# EAGLE board GPS_radiologger_v6 (EAGLE 9.5.2)
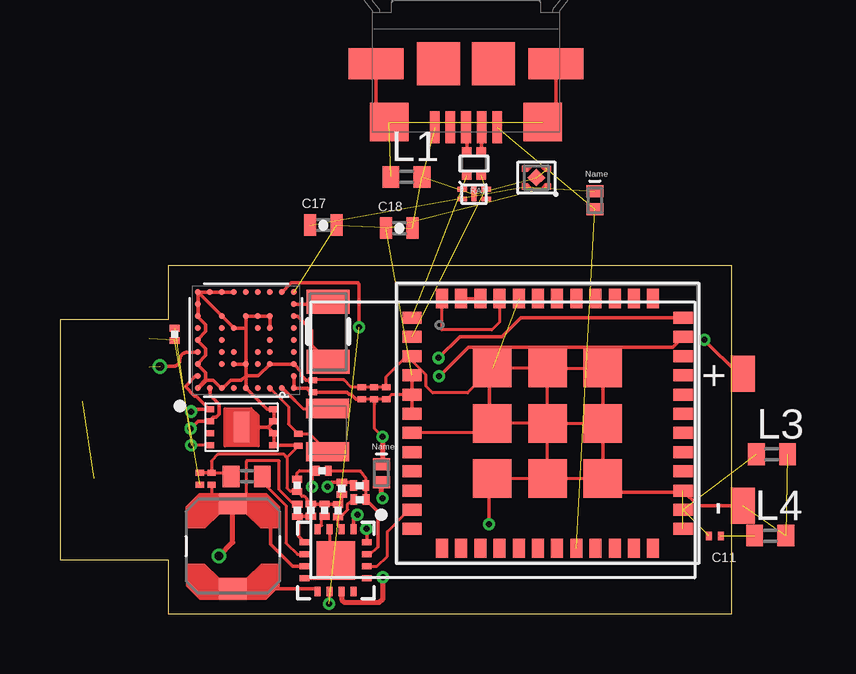
[diagram p0: board, top side]
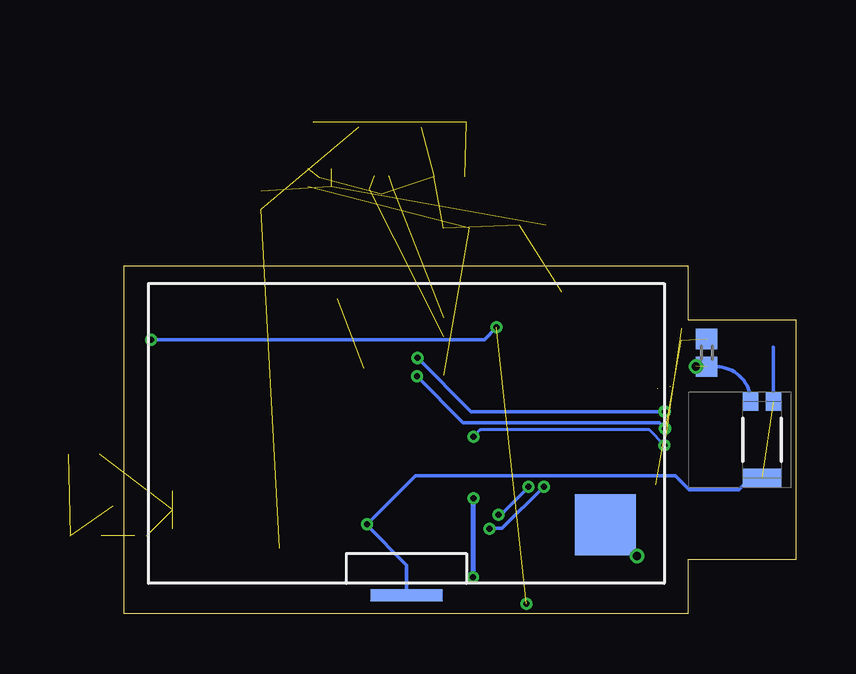
[diagram p1: board, bottom side, seen from below]

Size 28 x 14.5 mm. Coordinates in mm from the lower left corner, seen from the top.
Outline: 4.5,0 28,0 28,14.5 4.5,14.5 4.5,12.25 0,12.25 0,2.25 4.5,2.25 4.5,0
Copper layers (1*16): Top 0.035mm / dielectric 1.5mm / Bottom 0.035mm
Design rules "default *": minimum track width 5mil, minimum drill 0.25mm, track to track 5mil, track to pad 5mil, pad to pad 5mil, via to via 5mil, smd to smd 5mil, copper to edge 20mil, drill to drill 3mil, minimum pad ring 10mil, minimum via ring 5mil, stop-mask expansion 4mil, vias tented up to drill 0mil, thermal gap 10mil
Net classes: 1 vcc: width 0 mm

## Footprints (pad centres in the part's own frame; a part is rotated, then mirrored left to right if it is on the bottom)
C0201 = smd 0.25 x 0.35: 1 -0.25,0; 2 0.25,0
C0402 = smd 0.7 x 0.9: 1 -0.65,0; 2 0.65,0
0402-CAP = smd 0.5 x 0.9: 1 -0.55,0; 2 0.55,0
CDSQR4148-HF = smd 0.7 x 0.5: P$1 0,0.375; P$2 0,-0.375
USBULC6-2N4 = smd 0.2 x 0.4: P$1 0.2,0.5; P$2 -0.2,0.5; P$3 -0.2,-0.5; P$4 0.2,-0.5 | smd 0.6 x 0.2: P$5 0,0
0402 = smd 0.85 x 0.9: 1 -0.58,0; 2 0.58,0
1981584-1 = smd 0.4 x 1.35: 1 -1.3,4.1; 2 -0.65,4.1; 3 0,4.1; 4 0.65,4.1; 5 1.3,4.1 | smd 1.8 x 1.8: M1 -1.15,1.45; M2 1.15,1.45 | smd 2.3 x 1.3: S1 -3.75,1.45; S2 3.75,1.45 | smd 1.6 x 1.6: S3 -3.2,3.885; S4 3.2,3.885
0402' = smd 0.7 x 0.9: 1 -0.65,0; 2 0.65,0
0806 = smd 0.8 x 1.8: 1 -0.9,0; 2 0.9,0
IND_LPS4012-103MRB = smd 0.87 x 1.15: 1 -1.765,0; 2 1.765,0
R0201 = smd 0.28 x 0.43: 1 -0.255,0; 2 0.255,0
EXB24V = smd 0.4 x 0.36: P$1 -0.3,0.5; P$2 0.3,0.5; P$3 -0.3,-0.5; P$4 0.3,-0.5
TYPEABZ = smd 0.8 x 0.5: P$1 -5.65,4.4; P$2 -5.65,3.6; P$3 -5.65,2.8; P$4 -5.65,2; P$5 -5.65,1.2; P$6 -5.65,0.4; P$7 -5.65,-0.4; P$8 -5.65,-1.2; P$9 -5.65,-2; P$10 -5.65,-2.8; P$11 -5.65,-3.6; P$12 -5.65,-4.4; P$25 5.65,-4.4; P$26 5.65,-3.6; P$27 5.65,-2.8; P$28 5.65,-2; P$29 5.65,-1.2; P$30 5.65,-0.4; P$31 5.65,0.4; P$32 5.65,1.2; P$33 5.65,2; P$34 5.65,2.8; P$35 5.65,3.6; P$36 5.65,4.4 | smd 0.5 x 0.8: P$13 -4.4,-5.2; P$14 -3.6,-5.2; P$15 -2.8,-5.2; P$16 -2,-5.2; P$17 -1.2,-5.2; P$18 -0.4,-5.2; P$19 0.4,-5.2; P$20 1.2,-5.2; P$21 2,-5.2; P$22 2.8,-5.2; P$23 3.6,-5.2; P$24 4.4,-5.2; P$37 4.4,5.2; P$38 3.6,5.2; P$39 2.8,5.2; P$40 2,5.2; P$41 1.2,5.2; P$42 0.4,5.2; P$43 -0.4,5.2; P$44 -1.2,5.2; P$45 -2,5.2; P$46 -2.8,5.2; P$47 -3.6,5.2; P$48 -4.4,5.2 | smd 1.6 x 1.6: P$49 -2.3,2.3; P$50 0,2.3; P$51 2.3,2.3; P$52 -2.3,0; P$53 0,0; P$54 2.3,0; P$55 -2.3,-2.3; P$56 0,-2.3; P$57 2.3,-2.3
UBLOX_ZOE_M8-0-10 = smd 0.25 x 0.25: 1 -1.996,2.004; 2 -1.496,2.004; 3 -0.996,2.004; 4 -0.496,2.004; 5 0.004,2.004; 6 0.504,2.004; 7 1.004,2.004; 8 1.504,2.004; 9 2.004,2.004; 10 2.004,1.504; 11 2.004,1.004; 12 2.004,0.504; 13 2.004,0.004; 14 2.004,-0.496; 15 2.004,-0.996; 16 2.004,-1.496; 17 2.004,-1.996; 18 1.504,-1.996; 19 1.004,-1.996; 20 0.504,-1.996; 21 0.004,-1.996; 22 -0.496,-1.996; 23 -0.996,-1.996; 24 -1.496,-1.996; 25 -1.996,-1.996; 26 -1.996,-1.496; 27 -1.996,-0.996; 28 -1.996,-0.496; 29 -1.996,0.004; 30 -1.996,0.504; 31 -1.996,1.004; 32 -1.996,1.504; 33 -0.996,1.004; 34 -0.496,1.004; 35 0.004,1.004; 36 0.504,1.004; 37 1.004,1.004; 38 1.004,0.004; 39 1.004,-0.496; 40 1.004,-0.996; 41 0.504,-0.996; 42 0.004,-0.996; 43 -0.496,-0.996; 44 -0.996,-0.996; 45 -0.996,-0.496; 46 -0.996,0.004; 47 -0.996,0.504; 48 -0.496,0.504; 49 0.504,0.504; 50 0.504,-0.496; 51 -0.496,-0.496
NCP161 = smd 0.24 x 0.24: P$1 -0.37,-0.48; P$2 0.37,-0.48; P$3 0.37,0.48; P$4 -0.37,0.48 | smd 0.52 x 0.52 rotated 45: P$5 0,0
GMB301016 = smd 1.5 x 1: + -2.75,10; - 2.75,10
8-SON_2X3 = smd 0.25 x 0.4: P$1 0.75,-1.35; P$2 0.25,-1.35; P$3 -0.25,-1.35; P$4 -0.75,-1.35; P$5 -0.75,1.35; P$6 -0.25,1.35; P$7 0.25,1.35; P$8 0.75,1.35 | smd 1.27 x 0.635: P$9 0,0
LFCSP-16-3X3 = smd 0.4 x 0.25: 1 -1.3,0.75; 2 -1.3,0.25; 3 -1.3,-0.25; 4 -1.3,-0.75; 9 1.3,-0.75; 10 1.3,-0.25; 11 1.3,0.25; 12 1.3,0.75 | smd 0.25 x 0.4: 5 -0.75,-1.3; 6 -0.25,-1.3; 7 0.25,-1.3; 8 0.75,-1.3; 13 0.75,1.3; 14 0.25,1.3; 15 -0.25,1.3; 16 -0.75,1.3 | smd 1.6 x 1.6: EXP 0,0
ICARUS_FULL = smd 2.54 x 2.54: P$1 -3.81,-8.29 | smd 0.5 x 3: P$2 -6.75,0
CRYSTAL-SMD-3.2X1.5MM = smd 1 x 1.8: P$1 -1.25,0; P$2 1.25,0
W3011 = smd 0.8 x 0.65: 1 1.6,0.475; 2 1.6,-0.475 | smd 0.8 x 1.6: 3 -1.6,0

## Placement (x,y rotation side)
C1  47 pF  [C0201]  5.84,5.62 90 top
C2  10 uF  [C0201]  13.61,9.19 270 top
C5  4.7 uF  [C0201]  9.94,7.26 270 top
C6  0.1 uF  [C0201]  10.55,9.49 90 top
C9  1 uF  [C0201]  13.09,9.19 270 top
C10  0.1 uF  [C0201]  12.58,9.2 270 top
C11  0.1 uF  [C0201]  27.31,3.25 180 top
C14  4.7uF  [C0201]  6.32,5.62 90 top
C15  10uF  [C0402]  7.79,5.73 180 top
C17  1 uF  [0402-CAP]  10.97,16.2 0 top
C18  1 uF  [0402-CAP]  14.15,16.07 0 top
D1  CDSQR4148-HF  [CDSQR4148-HF]  22.3,17.23 0 top
D2  CDSQR4148-HF  [CDSQR4148-HF]  13.4,5.87 0 top
D4  USBULC6-2N4  [USBULC6-2N4]  17.27,17.49 90 top
FB1  FERRITE_BEAD-120_OHM-0402  [0402]  3.72,10.88 90 bottom
J1  1981584-1  [1981584-1]  16.93,24.38 180 top  (outside the outline)
L1  BLM15HB121SN1  [0402']  14.44,18.21 0 top  (outside the outline)
L2  2.2uH  [0806]  11.16,7.66 90 top
L3  BLM15HB121SN1  [0402']  29.68,6.65 0 top
L4  BLM15HB121SN1  [0402']  29.61,3.26 0 top
L5  22 uH  [IND_LPS4012-103MRB]  7.21,2.82 270 top
R1  10  [R0201]  4.78,11.65 90 top
R2  6.34M  [R0201]  9.9,4.31 90 top
R3  14.7M  [R0201]  10.46,4.32 270 top
R4  20k  [R0201]  11.03,4.32 270 top
RA1  EXB24V  [EXB24V]  17.26,18.76 180 top  (outside the outline)
RPG1  6.04M  [R0201]  10.93,5.96 0 top
RPG2  3.2M  [R0201]  9.88,5.36 90 top
RSD1  6.04M  [R0201]  12.5,5.34 0 top
RSD2  3.2M  [R0201]  11.75,5.23 90 top
RTERM1  4.12M  [R0201]  12.5,4.76 0 top
RTERM2  5.9M  [R0201]  11.59,4.31 270 top
U1  TYPEABZ  [TYPEABZ]  20.33,7.94 0 top
U2  UBLOX_ZOE_M8-0-10  [UBLOX_ZOE_M8-0-10]  7.75,11.4 90 top
U5  NCP161  [NCP161]  19.86,18.18 90 top  (outside the outline)
U$1  GMB301016  [GMB301016]  18.47,7.25 270 top
U$2  MB85RC64TA  [8-SON_2X3]  7.57,7.78 90 top
U$3  ADP5090  [LFCSP-16-3X3]  11.5,2.23 270 top
U$4  ICARUS_FULL  [ICARUS_FULL]  16.23,7.52 90 bottom
Y1  32.768kHz  [CRYSTAL-SMD-3.2X1.5MM]  11.18,11.76 90 top
Y2  W3011  [W3011]  1.41,7.26 90 bottom

## Library data of the parts
C1 C2 C5 C6 C9-C11 C14 = rcl; SPICEPREFIX: C
C15 R2-R4 RPG1 RPG2 RSD2 RTERM2 = resistor
C17 C18 = SparkFun-Capacitors
D1 D2 D4 RA1 U1 U5 = Kris
FB1 = SparkFun-Coils; MFG_PART: BLM15HB121SN1D; PROD_ID: NDUC-14206
J1 = con-usb; MF: Hirose; MPN: ZX62-AB-5PA(11)
L1 L3 L4 = inductors
L2 = SparkFun-Coils; PROD_ID: NDUC-14257
L5 = LPS4012-103MRB; AVAILABILITY: Unavailable; DESCRIPTION: Power inductor, shielded, 20/30% tol, SMT, RoHS, lead-free, halogen-free; MF: Coilcraft; MP: LPS4012-103MRB; PACKAGE: None; PRICE: None
R1 RSD1 RTERM1 = rcl; SPICEPREFIX: R
U2 = SparkFun-GPS; PROD_ID: IC-14251
U$1 = Powerstream
U$2 = Fujitsu_FRAM
U$3 = ADP5090_LFCSP-16-3X3
U$4 = TrisolX_Solar_Cells
Y1 = SparkFun-Clocks; PROD_ID: XTAL-13062
Y2 = SparkFun-GPS; PROD_ID: ANT-14304

## Nets
!INT: U2.43
!RESET: U2.20
!RST: U1.P$34
!SAFEBOOT: U2.34
A0: U1.P$22
ANT: C11.1 L4.1
BAT: U2.16 U$1.+ U$3.10
BTN: U1.P$43
D0: U1.P$18
D1: U1.P$19
D_SEL: U2.48
DIS_SW: U1.P$11 U$3.14
DM: D4.P$4 RA1.P$1 U1.P$2
DP: D4.P$1 RA1.P$2 U1.P$1
GND: C1.2 C2.1 C5.2 C6.2 C9.1 C10.1 C14.2 C15.2 C17.2 C18.2 D4.P$5 J1.5 L1.2 L3.2 L4.2 R3.1 R4.1 RPG2.1 RSD2.1 RTERM2.1 U1.P$3 U1.P$7 U1.P$25 U1.P$27 U1.P$44 U1.P$49 U1.P$50 U1.P$51 U1.P$52 U1.P$53 U1.P$54 U1.P$55 U1.P$56 U1.P$57 U2.1 U2.3 U2.5 U2.7 U2.8 U2.9 U2.10 U2.11 U2.12 U2.17 U2.23 U2.29 U2.31 U2.37 U2.38 U2.39 U2.40 U2.41 U2.44 U2.46 U2.47 U2.49 U5.P$2 U5.P$5 U$1.- U$2.P$1 U$2.P$2 U$2.P$3 U$2.P$4 U$2.P$9 U$4.P$2 Y2.2 Y2.3
GPS_ANT: FB1.1 U2.4 Y2.1
ID: J1.4
N$1: U1.P$45 U1.P$48
N$3: U$2.P$6
N$4: L2.2 U2.26
N$5: L5.2 U$3.9
N$6: U$3.3 U$3.8 U$3.EXP
N$7: R2.1 R3.2 U$3.5
N$8: C15.1 U$3.6
N$9: C1.1 FB1.2 R1.1
N$10: R4.2 U$3.4
N$11: RTERM1.1 RTERM2.2 U$3.2
N$12: RPG1.1 RPG2.2 U$3.16
N$13: C5.1 L2.1 U2.27
N$14: U2.18 Y1.P$2
N$15: U2.19 Y1.P$1
N$16: RSD1.1 RSD2.2 U$3.1
N$17: RPG1.2 RSD1.2 RTERM1.2 U$3.15
N$31: J1.3 RA1.P$4
N$32: C11.2 L3.1 U1.P$26
N$33: J1.2 RA1.P$3
N$60: C17.1 D1.P$1 U5.P$3 U5.P$4
PGOOD: U$3.13
RXI/MOSI: U2.22
SCL: U1.P$35 U2.32 U$2.P$7
SDA: U1.P$36 U2.2 U$2.P$8
SOLAR_3V3: D2.P$2 U$3.11
SWDCLK: U1.P$42
SWDIO: U1.P$41
SYS_3V3: C2.2 C6.1 C9.2 C10.2 C18.1 D2.P$1 R1.2 U1.P$4 U1.P$5 U1.P$6 U2.24 U2.25 U5.P$1 U$2.P$5
TCXO_OUT: U1.P$46 U1.P$47
TIMEPULSE: U2.33
TXO/MISO: U2.21
USB_SHIELD: J1.S1 J1.S2 J1.S3 J1.S4 L1.1
VBUS: D1.P$2 J1.1 U1.P$20
VIN: C14.1 L5.1 R2.2 U$3.7 U$4.P$1
VREF+: U1.P$32

## Tracks (layer width: path | path; a pad name or v marks a point on that pad's centre or on a via)
ANT  (1 unrouted)
BAT  (via drill 0.25)  (1 unrouted)
  Top 0.152: U$1.+ 28.28,10 26.87,11.4 v26.87,11.43 | v12.48,11.94 12.48,13.74 12.42,13.79 9.64,13.79 U2.16 | U$3.10 11.25,0.61 11.23,0.58 v11.23,0.42
  Bottom 0.152: v26.87,11.43 12.98,11.43 v12.48,11.94
DIS_SW
  Top 0.127: U$3.14 13.22,1.98 13.65,2.41 13.65,3.43 14.56,4.34 U1.P$11
DM  (2 unrouted)
DP  (2 unrouted)
GND  (via drill 0.25)  (13 unrouted)
  Top 0.127: R3.1 10.3,4.74 10.3,4.79 10.19,4.9 10.09,4.9 RPG2.1 9.6,5.11 9.46,5.24 9.46,6.5 | C15.2 7,5.87 C14.2 6.32,6.38 6.58,6.64 9.35,6.64 9.48,6.51 9.46,6.5 | C5.2 9.46,6.53 9.46,6.5 | C6.2 10.56,9.75 11.84,9.75 12.14,9.45 C10.1 C9.1 C2.1 13.57,9.47 13.57,9.87 14.45,10.74 U1.P$3 14.68,10.55 15.26,9.97 15.26,9.49 15.53,9.21 17,9.21 U1.P$49 18.48,10.24 U1.P$50 | U1.P$57 U1.P$56 | U1.P$56 U1.P$55 17.88,5.64 | U1.P$56 U1.P$53 | U1.P$53 U1.P$50 | U1.P$50 U1.P$51 | U1.P$53 18.51,7.94 U1.P$52 17.63,7.54 U1.P$7 | U1.P$53 U1.P$54
  Top 0.152: 7.75,11.95 U2.38 U2.39 U2.40 U2.41 | 7.75,11.95 U2.46 | U2.46 U2.47 | 7.75,11.95 7.7,11.9 U2.49 U2.37 U2.9 | U2.46 7.75,9.92 | 7.75,9.92 U2.29 8.62,8.53 U$2.P$1 U$2.P$2 8.67,7.78 | 7.75,9.92 8.27,9.92 U2.44 U2.23 10.08,10.07 10.08,9.92 10.27,9.74 C6.2 | 7.75,9.92 7.56,9.73 7.12,9.73 6.79,9.4 U2.31 | U2.9 U2.10 U2.12 | U2.9 U2.8 U2.7 5.75,12.37 6.08,12.04 6.08,11.77 5.75,11.44 U2.5 5.75,11.37 6.08,11.04 6.08,10.77 5.75,10.44 U2.3 5.75,10.37 6.08,10.04 6.08,9.77 5.75,9.44 U2.1 5.79,9.4 | U2.31 6.71,9.4 | 5.79,9.4 5.77,9.4 | 8.67,7.78 U$2.P$9 | 8.67,7.78 U$2.P$3 U$2.P$4 9.92,7.03 C5.2 | R4.1 R3.1 | R3.1 | 11.03,4.61 R4.1 | RPG2.1 | R4.1 11.58,4.58 RTERM2.1 11.75,4.72 RSD2.1 | U$1.- 26.62,4.5 U1.P$27 25.9,5.07 22.59,5.07 22.45,5.2 22.45,5.47 U1.P$57 | 23.94,5.07 22.63,5.07 U1.P$54 U1.P$51 | v17.88,3.74 17.88,5.64 | 17.94,7.37 18.51,7.94 | U1.P$52 17.91,8.06 17.91,9.67 | 17.85,9.61 18.48,10.24 | C14.2 C1.2 | U2.31 6.71,9.4 | 6.71,9.4 6.39,9.73 6.12,9.73 5.79,9.4
  Bottom 0.152: U$4.P$2 16.23,2.04 17.91,3.71 v17.88,3.74 15.86,5.76 5.02,5.76 4.44,5.18 2.38,5.18 1.9,5.66 Y2.3 | Y2.2 0.94,11.1 0.95,11.11
GPS_ANT  (via drill 0.35)  (1 unrouted)
  Top 0.152: U2.4 5.31,10.9 arc90 5,10.59 arc-90 4.72,10.31 v4.17,10.31
  Bottom 0.152: Y2.1 Y2.1 arc-90 3.32,10.3 FB1.1
N$1
  Top 0.127: U1.P$48 15.93,11.83 18,11.83 18.33,12.16 U1.P$45
N$4
  Top 0.127: 9.78,8.91 10.13,8.56 L2.2
  Top 0.152: U2.26 9.29,9.4 9.78,8.91
N$5
  Top 0.152: U$3.9 10.75,1.05 L5.2
N$6
  Top 0.127: U$3.3 11.25,2.23 | U$3.8 11.5,1.48
  Top 0.152: 11.25,2.23 U$3.EXP 11.5,1.48
N$7
  Top 0.152: U$3.5 9.95,3.23 9.95,4.06 R2.1 R3.2
N$8
  Top 0.127: 8.64,5.44 8.64,5.29 9.42,4.51 9.42,2.95 9.9,2.48 U$3.6
  Top 0.152: 8.64,5.44 C15.1
N$9  (2 unrouted)
N$10
  Top 0.127: U$3.4 10.91,3.69 10.91,4.04
  Top 0.152: R4.2 10.96,3.99 10.91,4.04 | U$3.4 10.75,3.62
N$11
  Top 0.127: U$3.2 11.59,3.68 RTERM2.2 11.61,4.03 11.69,4.03 12,4.34 12,4.57 RTERM1.1
  Top 0.152: 11.66,4.12 RTERM2.2
N$12  (via drill 0.25)
  Top 0.127: RPG2.2 9.88,5.87 9.98,5.97 9.99,5.96 RPG1.1
  Top 0.152: RPG2.2 9.92,5.62 | RPG1.1 10.5,5.88 10.5,5.35 10.53,5.33 v10.5,5.3 | v12.77,3.54 12.8,3.52 U$3.16
  Bottom 0.152: v10.5,5.3 12.25,3.56 12.8,3.56 12.78,3.54 v12.77,3.54
N$13
  Top 0.127: U2.27 9.52,8.63 9.52,7.91 9.92,7.51 C5.1 10.41,7.51 L2.1
  Top 0.152: 8.75,9.31 U2.27
N$14
  Top 0.152: Y1.P$2 11.08,12.9 U2.18
N$15
  Top 0.152: Y1.P$1 10.5,11.19 10.5,11.82 9.91,12.4 U2.19
N$16  (via drill 0.25)
  Top 0.152: U$3.1 12.25,3.99 12.39,4.13 v12.4,4.13 | RSD1.1 12.11,5.48 RSD2.2 11.33,5.48 v11.15,5.3
  Bottom 0.152: v12.4,4.13 12.39,4.12 12.31,4.12 11.14,5.29 v11.15,5.3
N$17
  Top 0.127: 13.27,2.81 12.93,2.48 U$3.15 | RPG1.2 12.51,5.96 12.75,5.64 RSD1.2 RTERM1.2
  Top 0.152: 13.27,2.81 13.27,4.25 RTERM1.2
N$31
  Top 0.152: RA1.P$4 16.96,20.24 J1.3
N$32  (2 unrouted)
N$33
  Top 0.152: J1.2 17.56,20.26 RA1.P$3
N$60  (3 unrouted)
SCL  (via drill 0.25)
  Top 0.152: U2.32 6.25,9.11 6.63,8.74 6.63,8.32 6.51,8.2 6.39,8.2 U$2.P$7 5.76,8.03 v5.45,7.72 | U1.P$35 25.55,11.11 17.04,11.11 15.82,9.89 v15.8,9.89
  Bottom 0.152: v15.8,9.89 13.88,7.97 5.7,7.97 v5.45,7.72
SDA  (via drill 0.25)  (1 unrouted)
  Top 0.152: 5.23,9.46 5.62,9.07 5.68,9.07 U$2.P$8 5.57,8.53 v5.47,8.43 | U2.2 5.69,9.9 5.69,9.94 5.23,9.48 | U1.P$36 19.22,12.34 18.44,11.55 16.67,11.55 v15.78,10.66
  Bottom 0.152: v5.47,8.43 5.49,8.42 13.54,8.42 v15.78,10.66
SOLAR_3V3  (via drill 0.25)
  Top 0.2: U$3.11 11.75,0.61 11.74,0.61 11.74,0.6 11.86,0.48 13.31,0.48 13.46,0.63 v13.46,1.53 | v13.44,4.82 13.4,4.86 D2.P$2
  Bottom 0.2: v13.46,1.53 13.46,4.8 v13.44,4.82
SYS_3V3  (via drill 0.25)  (3 unrouted)
  Top 0.127: U$2.P$5 5.52,7.03 5.5,7.05 v5.47,7.03 | C10.2 C9.2 C2.2 13.82,9.14 U1.P$5 | v13.44,7.39 13.11,7.72 13.11,8.76
  Top 0.152: U1.P$4 U1.P$5 U1.P$6 | U2.24 U2.25 10.29,9.4 | 10.33,9.4 10.29,9.4 | 10.29,9.4 10.45,9.24 C6.1 11.97,9.24 12.05,9.16 12.14,9.16 12.35,8.95 C10.2 | 13.11,8.76 13.11,8.92 C9.2
  Top 0.2: U1.P$6 14.64,8.3 | D2.P$1 13.44,6.28 v13.44,7.39
  Bottom 0.127: v5.47,7.03 6.11,7.66 13.17,7.66 v13.44,7.39
TCXO_OUT
  Top 0.152: U1.P$47 U1.P$46
USB_SHIELD  (2 unrouted)
  Top 0.152: J1.S2 13.18,21.04 J1.S4 | J1.S1 20.68,21.04 J1.S3
VBUS  (2 unrouted)
VIN  (via drill 0.35)
  Top 0.127: 9.75,4.57 R2.2 9.75,4.57 | L5.1 6.56,4.58 6.32,4.58 C14.1 | 9.75,4.57 9.14,5.18 9.14,6.38 7.77,6.38 7.77,4.65 7.83,4.58
  Top 0.152: 6.56,4.58 6.31,4.84 | L5.1 7.83,4.58 8.47,4.58 8.79,4.28 8.78,4.27 8.78,2.91 9.71,1.98 U$3.7
  Top 0.2: v6.63,2.41 7.21,2.98 L5.1
  Bottom 0.152: U$4.P$1 v6.64,2.41 v6.63,2.41